# Altium PCB power.PcbDoc (part 2 of 2)
Units mm, origin at the board's own origin, x right, y up, seen from the top; angles counter-clockwise.
Board outline 100 x 100 mm, 2 copper layers (Top Layer, Bottom Layer); 57 components, 26 nets, 166 pads, 23 vias.
Unrouted connection lines stored in the file: 41.
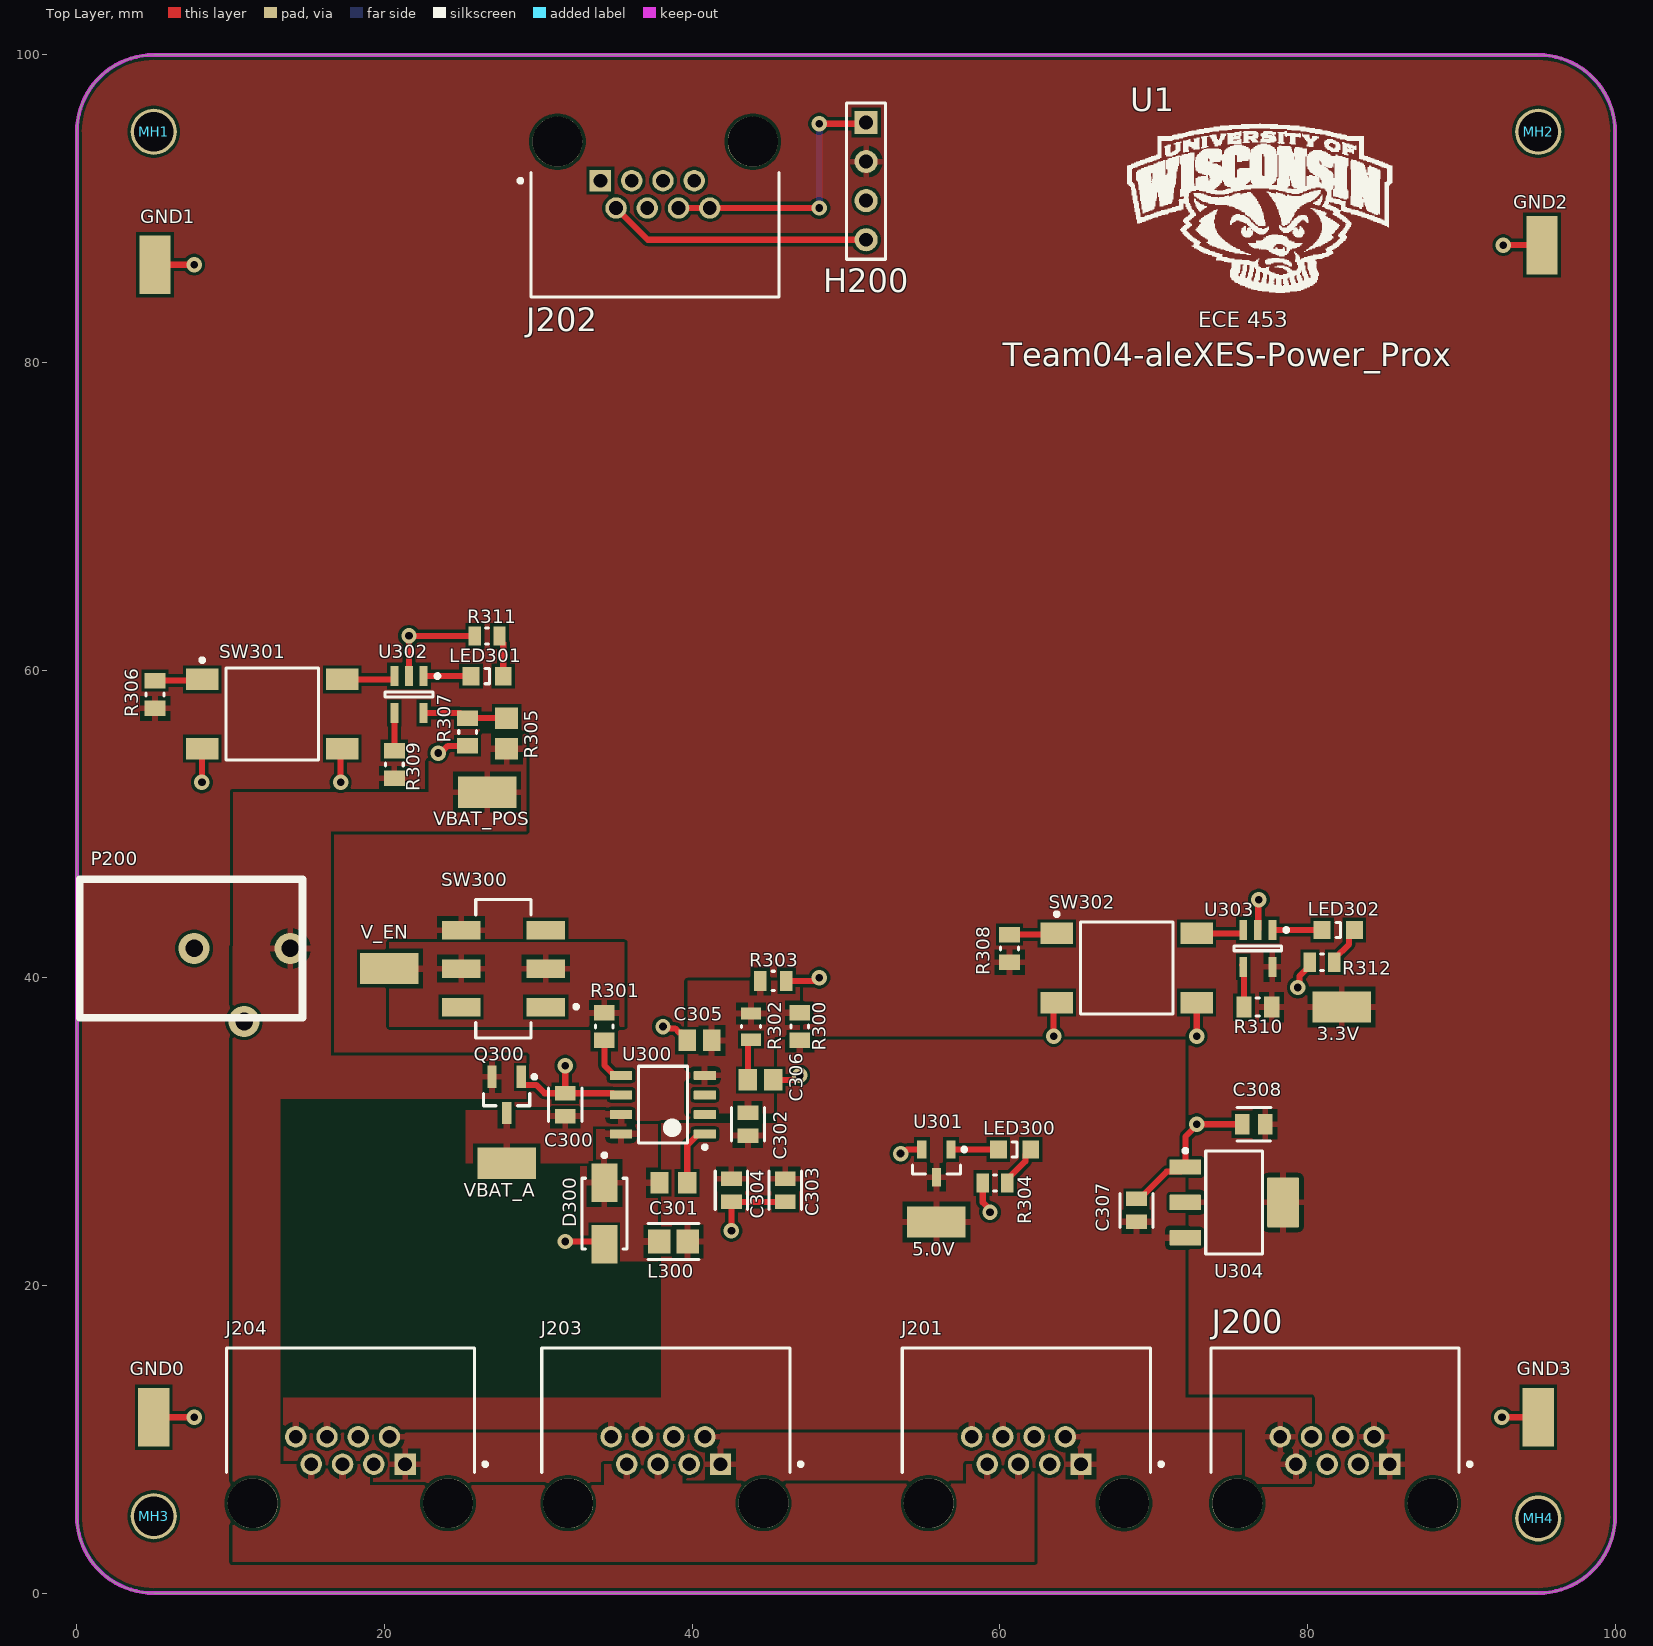
[diagram p0: Top Layer view]

## Part data (continued)
R303: library part CMP-2001-03875-2, "RES Thick Film, 3.24kΩ, 1%, 0.125W, 100ppm/°C, 0805", Case Code (Imperial)=0805, Case Code (Metric)=2012, Manufacturer=Vishay, Max Operating Temperature=155°C, Max Power Dissipation=125mW, Min Operating Temperature=-55°C, Package Height=0.45mm, Package Length=2mm, Package Quantity=10, Package Shape=Rectangular, Package Style=SMTMeter, Package Width=1.25mm, Rated Temperature=70°C, Resistance=3.24kR, Resistance Tolerance=1%, Resistor Type="Thick Film", Supplier Part Number=541-3.24KCCT-ND, Temperature Coefficient=100ppm/°C, Voltage Rating=150V, Case/Package=0805, Category="Chip SMD Resistors", ComponentLink1Description=https://datasheet.ciiva.com:443/pdfs/VipMasterIC/IC/VISH/VISH-S-A0007266705/VISH-S-A0007266705-1.pdf?src-supplier=IHS+Markit, ComponentLink1URL=https://datasheet.ciiva.com:443/pdfs/VipMasterIC/IC/VISH/VISH-S-A0007266705/VISH-S-A0007266705-1.pdf?src-supplier=IHS+Markit, ComponentLink2Description=https://datasheet.ciiva.com/16783/70201119-16783896.pdf?src-supplier=Allied+Electronics, ComponentLink2URL=https://datasheet.ciiva.com/16783/70201119-16783896.pdf?src-supplier=Allied+Electronics, ComponentLink3Description=https://datasheet.ciiva.com/7670/1697337-7670300.pdf?src-supplier=Element14, ComponentLink3URL=https://datasheet.ciiva.com/7670/1697337-7670300.pdf?src-supplier=Element14, ComponentLink4Description=https://datasheet.ciiva.com/7670/1533075-7670379.pdf?src-supplier=Element14, ComponentLink4URL=https://datasheet.ciiva.com/7670/1533075-7670379.pdf?src-supplier=Element14, ComponentLink5Description=https://datasheet.ciiva.com/2496/dcrcwe3-2496040.pdf?src-supplier=Digi-Key, ComponentLink5URL=https://datasheet.ciiva.com/2496/dcrcwe3-2496040.pdf?src-supplier=Digi-Key, ComponentLink6Description=https://datasheet.ciiva.com/2496/dcrcwe3-2496041.pdf?src-supplier=Digi-Key, ComponentLink6URL=https://datasheet.ciiva.com/2496/dcrcwe3-2496041.pdf?src-supplier=Digi-Key, ComponentLink7Description=https://datasheet.ciiva.com/2496/dcrcwe3-2496042.pdf?src-supplier=Digi-Key, ComponentLink7URL=https://datasheet.ciiva.com/2496/dcrcwe3-2496042.pdf?src-supplier=Digi-Key, ComponentLink8Description=https://datasheet.ciiva.com/9080/dcrcwe3-9080725.pdf?src-supplier=Avnet, ComponentLink8URL=https://datasheet.ciiva.com/9080/dcrcwe3-9080725.pdf?src-supplier=Avnet, Construction=Rectangular, Contact Plating=Tin, Depth=1.25mm, Features="Automotive AEC-Q200", Height=0.02inch, JESD-609 Code=e3, Lead Free="Lead Free", Length=2mm, Manufacturer Part Number=CRCW08053K24FKEA, Military Standard=Not, Mounting Technology="Surface Mount", Number of Pins=2, Number of Terminations=2, Packaging="Tape and Reel", Pins=2, Power=125mW, Power Rating=125mW, Pricing="1=0.1, 10=0.038, 50=0.0244, 100=0.0206, 500=0.01434, 1000=0.01248 (USD)", Radiation Hardening=No, Reach SVHC Compliant=Yes, Reference Standard=AEC-Q200, RoHS=Yes, RoHS Compliant=Yes, Series=CRCW, Size Code=0805, Stock=14960, Supplier=Digi-Key, Technology="THICK FILM", Terminal Finish=Nickel, Termination=Solder, Tolerance=1%, Voltage Rating (DC)=150V, Weight=0.000194oz, Width=1.25mm, Working Voltage=150V
R304 R311 R312: library part CMP-2000-06960-1, "Chip Resistor, 330 Ohm, +/- 1%, 125 mW, -55 to 155 degC, 0805 (2012 Metric), RoHS, Tape and Reel", Case Code (Imperial)=0805, Case Code (Metric)=2012, Manufacturer=Yageo, Manufacturer Part Number=CRCW0805330RFKEA, Max Operating Temperature=155°C, Max Power Dissipation=125mW, Min Operating Temperature=-55°C, Operating Temperature Range=-55Cto+155C, Package Description="2-Pin Surface Mounted Device, Body 2 x 1.25 mm", Package Quantity=5000, Power Rating=125mW(1/8W), Ratings=AEC-Q200, Resistance=330, Resistance Tolerance=1%, Resistor Type="Thick Film", Supplier Part Number=53K0164, Supplier Part Number 1=311-330CRCT-ND, Temperature Coefficient=100PPM/C, Voltage Rating=150V, Case Code - in=0805, Case Code - mm=2012, Case/Package=0805, Category="Chip SMD Resistors", ComponentLink1Description=https://datasheet.ciiva.com/2457/pyu-r-int-thick-7-2457015.pdf?src-supplier=Digi-Key, ComponentLink1URL=https://datasheet.ciiva.com/2457/pyu-r-int-thick-7-2457015.pdf?src-supplier=Digi-Key, ComponentLink2Description=https://datasheet.ciiva.com/2457/pyu-r-int-thick-7-2457016.pdf?src-supplier=Digi-Key, ComponentLink2URL=https://datasheet.ciiva.com/2457/pyu-r-int-thick-7-2457016.pdf?src-supplier=Digi-Key, ComponentLink3Description=https://datasheet.ciiva.com/2457/pyu-r-int-thick-7-2457014.pdf?src-supplier=Digi-Key, ComponentLink3URL=https://datasheet.ciiva.com/2457/pyu-r-int-thick-7-2457014.pdf?src-supplier=Digi-Key, ComponentLink4Description=https://datasheet.ciiva.com/12667/rc0805-12667925.pdf?src-supplier=Mouser, ComponentLink4URL=https://datasheet.ciiva.com/12667/rc0805-12667925.pdf?src-supplier=Mouser, ComponentLink5Description=https://datasheet.ciiva.com/7941/444164-7941768.pdf?src-supplier=Element14, ComponentLink5URL=https://datasheet.ciiva.com/7941/444164-7941768.pdf?src-supplier=Element14, ComponentLink6Description=https://datasheet.ciiva.com/7941/444164-7941769.pdf?src-supplier=Element14, ComponentLink6URL=https://datasheet.ciiva.com/7941/444164-7941769.pdf?src-supplier=Element14, ComponentLink7Description=https://datasheet.ciiva.com/16740/rc0805-16740975.pdf?src-supplier=Future+Electronics, ComponentLink7URL=https://datasheet.ciiva.com/16740/rc0805-16740975.pdf?src-supplier=Future+Electronics, ComponentLink8Description=https://datasheet.ciiva.com/8944/dcrcwe3-8944773.pdf?src-supplier=Avnet, ComponentLink8URL=https://datasheet.ciiva.com/8944/dcrcwe3-8944773.pdf?src-supplier=Avnet, ComponentLink9Description=https://datasheet.ciiva.com/8944/dcrcwe3-8944776.pdf?src-supplier=Avnet, ComponentLink9URL=https://datasheet.ciiva.com/8944/dcrcwe3-8944776.pdf?src-supplier=Avnet, ComponentLink10Description=https://datasheet.ciiva.com/7777/1697337-7777390.pdf?src-supplier=Element14, ComponentLink10URL=https://datasheet.ciiva.com/7777/1697337-7777390.pdf?src-supplier=Element14, ComponentLink11Description=https://datasheet.ciiva.com/16769/70201119-16769852.pdf?src-supplier=Allied+Electronics, ComponentLink11URL=https://datasheet.ciiva.com/16769/70201119-16769852.pdf?src-supplier=Allied+Electronics, Construction=Rectangular, Contact Plating=Tin, Datasheet URL=http://www.yageo.com/documents/recent/PYu-RC_Group_51_RoHS_L_7.pdf, Datasheet Version="Rev. 7, 05/2017", Depth=1.25mm, Features="Moisture Resistant", Height=0.024inch, Lead Free="Lead Free", Length=0.079inch, Manufacturer 1=Yageo, Manufacturer Part Number 1=RC0805FR-07330RL, Manufacturer URL=http://www.yageo.com/, Military Standard=Not, Mounting Technology=SurfaceMount, Number of Terminations=2, Package Reference=0805, Packaging=Reel, Pricing="1=0.02, 25=0.02, 50=0.02, 100=0.02 (USD)", Pricing 1="1=0.10000, 10=0.03700, 100=0.01510, 1000=0.00680, 2500=0.00590 (USD)", Product=ThickFilmResistorsGeneralPurpose, Reach SVHC Compliant=Unknown, RoHS=Yes, RoHS Compliant=Yes, Series=RC, Size Code=0805, Stock=218356, Stock 1=1297787, Supplier=Newark, Supplier 1=Digi-Key, Termination=SMD/SMT, Termination Style=SMD/SMT, Tolerance=1%, Voltage Rating (DC)=150V, Weight=0.000194oz, Width=0.049inch
R305: library part RES_0805_K_030.00, "Res Thick Film 0805 30K Ohm 1% 0.125W(1/8W) ±100ppm/°C Pad SMD Automotive T/R", Case Code (Imperial)=0805, Case Code (Metric)=2012, Manufacturer 1=Panasonic, Manufacturer Part Number 1=ERJ-6ENF3002V, Max Operating Temperature=155°C, Max Power Dissipation=125mW, Min Operating Temperature=-55°C, Package Quantity=1, Resistance Tolerance=1%, Resistor Type="Thick Film", Supplier Part Number 1=P30.0KCCT-ND, Temperature Coefficient=100ppm/°C, Voltage Rating=150V, Case/Package=0805, Category="Chip SMD Resistors", ComponentLink1Description=https://datasheet.ciiva.com/11821/0900766b80f80784-11821600.pdf?src-supplier=RSComponents, ComponentLink1URL=https://datasheet.ciiva.com/11821/0900766b80f80784-11821600.pdf?src-supplier=RSComponents, ComponentLink2Description=https://datasheet.ciiva.com/9117/aoa0000ce2-9117485.pdf?src-supplier=Avnet, ComponentLink2URL=https://datasheet.ciiva.com/9117/aoa0000ce2-9117485.pdf?src-supplier=Avnet, ComponentLink3Description=https://datasheet.ciiva.com/24124/aoa0000ce2-24124393.pdf?src-supplier=Mouser, ComponentLink3URL=https://datasheet.ciiva.com/24124/aoa0000ce2-24124393.pdf?src-supplier=Mouser, ComponentLink4Description=https://datasheet.ciiva.com/30169/aoa0000ce2-30169447.pdf?src-supplier=Onlinecomponents.com, ComponentLink4URL=https://datasheet.ciiva.com/30169/aoa0000ce2-30169447.pdf?src-supplier=Onlinecomponents.com, ComponentLink5Description=https://datasheet.ciiva.com/17210/aoa0000ce2-17210478.pdf?src-supplier=Avnet+Europe, ComponentLink5URL=https://datasheet.ciiva.com/17210/aoa0000ce2-17210478.pdf?src-supplier=Avnet+Europe, ComponentLink6Description=https://datasheet.ciiva.com/22673/1678782-22673293.pdf?src-supplier=Element14, ComponentLink6URL=https://datasheet.ciiva.com/22673/1678782-22673293.pdf?src-supplier=Element14, ComponentLink7Description=https://datasheet.ciiva.com/28565/1694929-28565193.pdf?src-supplier=Element14, ComponentLink7URL=https://datasheet.ciiva.com/28565/1694929-28565193.pdf?src-supplier=Element14, ComponentLink8Description=https://datasheet.ciiva.com/46441/1678782-46441405.pdf?src-supplier=Element14, ComponentLink8URL=https://datasheet.ciiva.com/46441/1678782-46441405.pdf?src-supplier=Element14, ComponentLink9Description=https://datasheet.ciiva.com/46441/1678782-46441406.pdf?src-supplier=Element14, ComponentLink9URL=https://datasheet.ciiva.com/46441/1678782-46441406.pdf?src-supplier=Element14, ComponentLink10Description=https://datasheet.ciiva.com/16512/aoa0000ce2-16512236.pdf?src-supplier=Avnet+Asia, ComponentLink10URL=https://datasheet.ciiva.com/16512/aoa0000ce2-16512236.pdf?src-supplier=Avnet+Asia, ComponentLink11Description=https://datasheet.ciiva.com/7711/1678782-7711062.pdf?src-supplier=Element14, ComponentLink11URL=https://datasheet.ciiva.com/7711/1678782-7711062.pdf?src-supplier=Element14, Construction=Rectangular, Contact Plating=Tin, Depth=1.25mm, Features="Automotive AEC-Q200", Height=0.6mm, Lead Free="Lead Free", Length=2mm, Military Standard=Not, Mount="Surface Mount", Number of Terminations=2, Packaging="Tape and Reel", Power Rating=125mW, Pricing 1="1=0.10000, 10=0.07500, 100=0.02880, 1000=0.01265, 2500=0.01092 (USD)", Radiation Hardening=No, REACH SVHC=Unknown, Resistance=30K, RoHS=Yes, RoHS Compliant=Yes, Series=ERJ, Stock 1=296893, Supplier 1=Digi-Key, Technology="THICK FILM", Termination=SMD/SMT, Tolerance=1%, Voltage Rating (DC)=150V, Weight=0.000194oz, Width=0.049inch
SW300: "C & K COMPONENTS - JS202011SCQN - SWITCH, DPDT, 0.6A, 6VDC, SMD", Actuator Color=Black, Contact Current Rating=300mA, Contact Resistance=70mR, Flammability Rating="UL94 V-2", Manufacturer 1="ITT C&K", Max Operating Temperature=85°C, Max Voltage Rating (DC)=6V, Min Operating Temperature=-20°C, Package Quantity=1, Supplier Part Number 1=401-2002-1-ND, Actuator Length=2mm, Actuator Material=Nylon,Polyamide,PA46, Actuator Type=Standard, Category="Slide Switches", ComponentLink1Description=https://datasheet.ciiva.com/2889/js-29aug13-2889127.pdf?src-supplier=Digi-Key, ComponentLink1URL=https://datasheet.ciiva.com/2889/js-29aug13-2889127.pdf?src-supplier=Digi-Key, ComponentLink2Description=https://datasheet.ciiva.com/23829/1707718-23829488.pdf?src-supplier=Newark, ComponentLink2URL=https://datasheet.ciiva.com/23829/1707718-23829488.pdf?src-supplier=Newark, ComponentLink3Description=https://datasheet.ciiva.com/8625/js-9dec14-8625470.pdf?src-supplier=Avnet, ComponentLink3URL=https://datasheet.ciiva.com/8625/js-9dec14-8625470.pdf?src-supplier=Avnet, ComponentLink4Description=https://datasheet.ciiva.com/2889/js-15sept15-2889128.pdf?src-supplier=Digi-Key, ComponentLink4URL=https://datasheet.ciiva.com/2889/js-15sept15-2889128.pdf?src-supplier=Digi-Key, ComponentLink5Description=https://datasheet.ciiva.com/2889/js-15sept15-2889129.pdf?src-supplier=Digi-Key, ComponentLink5URL=https://datasheet.ciiva.com/2889/js-15sept15-2889129.pdf?src-supplier=Digi-Key, ComponentLink6Description=https://datasheet.ciiva.com/22630/1707718-22630697.pdf?src-supplier=Element14, ComponentLink6URL=https://datasheet.ciiva.com/22630/1707718-22630697.pdf?src-supplier=Element14, Contact Material="Copper Alloy", Contact Plating=Silver, Current Rating=300mA, Depth=7.5mm, Electrical Life=5000Cycles, Housing Material=Nylon, Lead Free="Lead Free", Length=9mm, Manufacturer Part Number 1=JS202011SCQN, Max Current Rating=300mA, Mount="Surface Mount", Orientation=Vertical, Packaging="Tape and Reel", Pricing 1="1=0.55000, 10=0.53000, 25=0.51040, 100=0.44180, 250=0.40252, 500=0.37306 (USD)", Radiation Hardening=No, REACH SVHC="No SVHC", RoHS=Yes, Series=JS, Stock 1=21096, Supplier 1=Digi-Key, Switch Function=On-On, Switch Travel=2mm, Termination="Gull Wing", Throw Configuration=DPDT, Voltage Rating (DC)=6V
SW301 SW302: library part CMP-2000-05602-2, "Swicth, SPST, 24 V, -35 to 85 degC, 4-Pin SMD, RoHS, Tape and Reel", Case/Package=SMD/SMT, Color=Black, Contact Current Rating=50mA, Contact Resistance=100mOhm, Insulation Resistance=100MR, Manufacturer="TE Connectivity", Max Operating Temperature=85degC, Max Voltage Rating (DC)=12V, Min Operating Temperature=-35degC, Operating Force=1.57N, Package Description="4-Pin Surface Mount Device, Body 6 x 6 mm, Pitch 4.5 mm", Package Quantity=750, Supplier Part Number=27AC5877, Supplier Part Number 1=450-1129-ND, Voltage Rating=24V, Actuator Length=0.055inch, Actuator Material=Polyamide, Actuator Type=Standard, Case\/Package=SMD/SMT, Category="Pushbutton Switches", Contact Material=CopperAlloy, Contact Plating=Silver, Current Rating=50mA, Datasheet URL=http://www.te.com/commerce/DocumentDelivery/DDEController?Action=showdoc&DocId=Customer+Drawing%7F2-1437565-7%7FV%7Fpdf%7FEnglish%7FENG_CD_2-1437565-7_V.pdf%7F4-1437565-2, Datasheet Version="Rev. V, 02/2015", Depth=10mm, Electrical Life=100000Cycles, ELV=Compliant, Illumination Type=Illuminated, Lead Free="Lead Free", Length=6mm, Manufacturer 1="TE Connectivity", Manufacturer Part Number=FSM4JSMA, Manufacturer Part Number 1=FSM4JSMA, Manufacturer URL=http://www.te.com/, Max Current Rating=50mA, Mechanical Life=100000Cycles, Mount=SurfaceMount, Mounting Technology=SurfaceMount, Orientation=Straight, Package Reference=FSM4JSMA, Packaging=LoosePiece, Pricing="1=0.292, 10=0.274, 25=0.255, 100=0.232, 500=0.2, 1000=0.166 (USD)", Pricing 1="1=0.27000, 10=0.26300, 25=0.24960, 100=0.22600, 250=0.20604, 750=0.19152, 1500=0.16339, 3000=0.15885, 5250=0.14977 (USD)", Radiation Hardening=No, REACH SVHC=Unknown, Reach SVHC Compliant=Unknown, RoHS=Yes, RoHS Compliant=Yes, RoHSCompliant=true, Series=FSMJSMA, Stock=46743, Stock 1=65608, Supplier=Newark, Supplier 1=Digi-Key, Switch Function=Off-Mom, Switch Travel=0.25mm, Termination=GullWing, Throw Configuration=SPST, Voltage Rating (DC)=24V, Width=6mm
U1: "Bucky Badger Image", Manufacturer Part Number="UW Bucky"
U300: library part CMP-0323-00191-3, "Buck Step Down Regulator with 5.5 to 36 V Input and 1.23 to 31 V Output, -40 to 125 degC, 8-Pin SOIC (D), Green (RoHS & no Sb/Br)", Case/Package=SOP, Frequency=600kHz, Manufacturer="Texas Instruments", Max Operating Temperature=125°C, Max Output current=1.8A, Max Supply Voltage=36V, Min Input Voltage=5.5V, Min Operating Temperature=-40°C, Package Body Material=Plastic, Package Equivalence Code=SOP8,.25, Package Shape=Rectangular, Package Style="SMALL OUTLINEMeter", Peak Reflow Temperature (Cel)=260°C, Rating=Catalog, Supplier Part Number=296-20787-5-ND, Switch Current Limit(Typ)(A)=1.2, Temperature Grade=AUTOMOTIVE, Category="Voltage Regulators - Switching", Channels=1, Code_JEDEC=MS-012AA, ComponentLink1Description=Datasheet, ComponentLink1URL=http://www.ti.com/general/docs/lit/getliterature.tsp?genericPartNumber=TPS5410&fileType=pdf, ComponentLink2Description="Package Specification", ComponentLink2URL=http://www.ti.com/litv/pdf/msoi002j, ComponentLink3Description="URL Link1", ComponentLink3URL="Samples URL:http://www.ti.com/product/tps5410#samples", ComponentLink4Description=https://www.ti.com:443/lit/ds/symlink/tps5410.pdf?src-supplier=IHS+Markit, ComponentLink4URL=https://www.ti.com:443/lit/ds/symlink/tps5410.pdf?src-supplier=IHS+Markit, ComponentLink5Description=https://datasheet.ciiva.com/15113/getdatasheetpartid-224296-15113874.pdf?src-supplier=Verical, ComponentLink5URL=https://datasheet.ciiva.com/15113/getdatasheetpartid-224296-15113874.pdf?src-supplier=Verical, ComponentLink6Description=https://datasheet.ciiva.com/2026/tps5410-2026736.pdf?src-supplier=Digi-Key, ComponentLink6URL=https://datasheet.ciiva.com/2026/tps5410-2026736.pdf?src-supplier=Digi-Key, ComponentLink7Description=https://datasheet.ciiva.com/27056/2003563-27056017.pdf?src-supplier=Jameco, ComponentLink7URL=https://datasheet.ciiva.com/27056/2003563-27056017.pdf?src-supplier=Jameco, ComponentLink8Description=https://datasheet.ciiva.com/7993/1851017-7993797.pdf?src-supplier=Element14, ComponentLink8URL=https://datasheet.ciiva.com/7993/1851017-7993797.pdf?src-supplier=Element14, Control Mode=VOLTAGE-MODE, Control Technique="PULSE WIDTH MODULATION", DatasheetVersion=SLVS675A, Duty Cycle(Max)(%)=87.5, Eco-Plan="Green (RoHS & no Sb/Br)", Height - Seated (Max)=1.75mm, Iout(Max)(A)=1, Iq(Typ)(mA)=3, JESD-30 Code=R-PDSO-G8, JESD-609 Code=e4, Length=4.9mm, Manufacturer Part Number=TPS5410D, Moisture Sensitivity Level=2, Mounting Technology="Surface Mount", PackageDescription="8-Pin Plastic Small Outline Integrated Circuit, 4.9 x 3.9 mm, Pitch 1.27 mm Pitch", PackageReference=D0008A, PackageVersion="revM, Jun-2011", PartNumber=TPS5410D, Pins=8, Pricing="1=3.42, 10=3.072, 25=2.9044, 100=2.517, 250=2.38796, 500=2.1427, 1000=1.80709, 2500=1.71674, 5000=1.6522 (USD)", Qualification Status="Not Qualified", Reach SVHC Compliant=Yes, Regulated Outputs(#)=1, RoHS=Yes, RoHS Compliant=Yes, Stock=6339, SubFamily="Step-Down Regulator", Supplier=Digi-Key, Surface Mount=Yes, Switcher Configuration=BUCK, Terminal Finish=Nickel, Terminal Form="Gull Wing", Terminal Pitch=1.27mm, Terminal Position=DUAL, Throw Configuration="SWITCHING REGULATOR", Topology=Buck, Vin(Max)(V)=36, Vin(Min)(V)=5.5, Vout(Max)(V)=31, Vout(Min)(V)=1.23, Width=3.9mm
U301: library part CMP-0130-00073-1, "1.75Î¼A Micropower Voltage Detector, Push-Pull Output, 4.63V, 3-Pin SOT-23, Extended Temperature, Tape and Reel", Case/Package=TSSOP, Manufacturer=Microchip, Max Operating Temperature=125°C, Max Supply Voltage=5.5V, Min Operating Temperature=-40°C, Min Supply Voltage=1V, Package Body Material=Plastic, Package Equivalence Code=TO-236, Package Shape=Rectangular, Package Style="SMALL OUTLINE, THIN PROFILE, SHRINK PITCHMeter", Peak Reflow Temperature (Cel)=260°C, Power Supplies=1/5.5V, Supplier Part Number=MCP112T-475E/TTCT-ND, Supply Current-Max (Isup)=1.75uA, Temperature Grade=AUTOMOTIVE, Threshold Voltage-Nom=4.63V, Time @ Peak Reflow Temperature-Max (s)=40s, Adjustable Threshold=No, Category="Voltage Supervisors", Channels=1, Code_IPC=SOT23-3, ComponentLink1Description=https://datasheet.ciiva.com:443/pdfs/VipMasterIC/IC/MCHP/MCHP-S-A0002312823/MCHP-S-A0002312823-1.pdf?src-supplier=IHS+Markit, ComponentLink1URL=https://datasheet.ciiva.com:443/pdfs/VipMasterIC/IC/MCHP/MCHP-S-A0002312823/MCHP-S-A0002312823-1.pdf?src-supplier=IHS+Markit, ComponentLink2Description=https://datasheet.ciiva.com/1974/21889d-1974510.pdf?src-supplier=Digi-Key, ComponentLink2URL=https://datasheet.ciiva.com/1974/21889d-1974510.pdf?src-supplier=Digi-Key, ComponentLink3Description=https://datasheet.ciiva.com/1974/21889d-1974511.pdf?src-supplier=Digi-Key, ComponentLink3URL=https://datasheet.ciiva.com/1974/21889d-1974511.pdf?src-supplier=Digi-Key, ComponentLink4Description=https://datasheet.ciiva.com/1974/21889d-1974512.pdf?src-supplier=Digi-Key, ComponentLink4URL=https://datasheet.ciiva.com/1974/21889d-1974512.pdf?src-supplier=Digi-Key, ComponentLink5Description=https://datasheet.ciiva.com/9215/21889d-9215465.pdf?src-supplier=Avnet, ComponentLink5URL=https://datasheet.ciiva.com/9215/21889d-9215465.pdf?src-supplier=Avnet, ComponentLink6Description=https://datasheet.ciiva.com/1170/21889d-1170331.pdf?src-supplier=Element14, ComponentLink6URL=https://datasheet.ciiva.com/1170/21889d-1170331.pdf?src-supplier=Element14, DatasheetVersion="revD, Jun-2005", Height - Seated (Max)=1.12mm, JESD-30 Code=R-PDSO-G3, JESD-609 Code=e3, Length=2.92mm, Manufacturer Part Number=MCP112T-475E/TT, Moisture Sensitivity Level=1, Number of Channels=1, PackageDescription="3-Lead Plastic Small Outline Transistor (TT) [SOT-23]", PackageReference=SOT-23-TT3, PackageVersion="revBB, Aug-2009", Pins=3, Pricing="1=0.6, 25=0.5, 100=0.46 (USD)", Qualification Status="Not Qualified", Reach SVHC Compliant=Yes, RoHS=Yes, RoHS Compliant=Yes, Stock=2856, Supplier=Digi-Key, Surface Mount=Yes, Terminal Finish=Tin, Terminal Form="Gull Wing", Terminal Pitch=0.96mm, Terminal Position=DUAL, Throw Configuration="POWER SUPPLY SUPPORT CIRCUIT", Width=1.3mm
U302 U303: library part CMP-0138-00207-1, "Voltage Supervisor, 5-Pin SOT-23, Extended Temperature, Tape and Reel", Case/Package=SOT-23, Manufacturer=Microchip, Max Operating Temperature=125°C, Max Output current=10mA, Max Power Dissipation=240mW, Max Reset Threshold Voltage=2.944V, Max Supply Current=10uA, Max Supply Voltage=5.5V, Min Operating Temperature=-40°C, Min Reset Threshold Voltage=2.857V, Min Supply Voltage=1V, Number of Voltages Monitored=1, Package Quantity=3000, Quiescent Current=1uA, Supplier Part Number=34M7402, Threshold Voltage=2.9V, Category="Voltage Supervisors", Code_IPC=SOT23-5, ComponentLink1Description=https://datasheet.ciiva.com/1969/21985d-1969832.pdf?src-supplier=Digi-Key, ComponentLink1URL=https://datasheet.ciiva.com/1969/21985d-1969832.pdf?src-supplier=Digi-Key, ComponentLink2Description=https://datasheet.ciiva.com/1969/21985d-1969833.pdf?src-supplier=Digi-Key, ComponentLink2URL=https://datasheet.ciiva.com/1969/21985d-1969833.pdf?src-supplier=Digi-Key, ComponentLink3Description=https://datasheet.ciiva.com/14562/70045388-14562791.pdf?src-supplier=Allied+Electronics, ComponentLink3URL=https://datasheet.ciiva.com/14562/70045388-14562791.pdf?src-supplier=Allied+Electronics, ComponentLink4Description=https://datasheet.ciiva.com/8140/21985c-8140440.pdf?src-supplier=Avnet, ComponentLink4URL=https://datasheet.ciiva.com/8140/21985c-8140440.pdf?src-supplier=Avnet, DatasheetVersion="revB, Oct-2007", Height=1.3mm, Lead Free="Lead Free", Length=3.1mm, Manufacturer Part Number=MCP1316T-29LE/OT, Mounting Technology="Surface Mount", Number of Elements=1, Operating Supply Current=10uA, Output=TOTEM-POLE, Overvoltage Threshold=2.944V, PackageDescription="5-Lead Plastic Small Outline Transistor (OT) [SOT-23]", PackageReference=SOT-23-OT5, PackageVersion="revBB, Aug-2009", Packaging="Tape and Reel", Pins=5, Power Dissipation=240mW, Pricing="1=0.877, 10=0.805, 25=0.732 (USD)", Radiation Hardening=No, Reach SVHC Compliant=No, Reset="Active Low", Reset Timeout=140ms, RoHS=Yes, RoHS Compliant=Yes, Stock=8598, Supplier=Newark, Supply Current=10uA, Termination=SMD/SMT, Type="Simple Reset/Power-On Reset", Undervoltage Threshold=2.857V, Watchdog Timer=Yes, Width=1.8mm
U304: library part CMP-0395-00499-2, "Single Output LDO, 1 A, Fixed 3.3 V Output, 2 to 5.5 V Input, 4-pin SOT-223 (DCY), -40 to 125 degC, Green (RoHS & no Sb/Br)", Case/Package=SOT-223, Dropout Voltage=455mV, Manufacturer="Texas Instruments", Manufacturer Part Number=TLV1117-33CDCYR, Max Input Voltage=5.5V, Max Operating Temperature=125°C, Max Output current=1A, Max Output Voltage=3.3V, Max Power Dissipation=1.59W, Max Supply Voltage=15V, Min Current Limit=1.1A, Min Input Voltage=2V, Min Operating Temperature=-40°C, Output Voltage Accuracy=1.5%, Package Quantity=250, Power Supply Rejection Ratio (PSRR)=75dB, Quiescent Current=50uA, Supplier Part Number=29AH1523, Supplier Part Number 1=296-35976-1-ND, Accuracy=2%, Accuracy(%)=2, Category="Voltage Regulators - Linear", Code_JEDEC=TO-261, ComponentLink1Description="Manufacturer URL", ComponentLink1URL=http://www.ti.com/, ComponentLink2Description=Datasheet, ComponentLink2URL=http://www.ti.com/general/docs/lit/getliterature.tsp?genericPartNumber=TLV1117LV33&fileType=pdf, ComponentLink3Description="Package Specification", ComponentLink3URL=http://www.ti.com/litv/pdf/mpds094a, ComponentLink4Description=http://www.ti.com/general/docs/lit/getliterature.tsp?genericPartNumber=TLV1117LV&&fileType=pdf&src-supplier=Farnell, ComponentLink4URL=http://www.ti.com/general/docs/lit/getliterature.tsp?genericPartNumber=TLV1117LV&&fileType=pdf&src-supplier=Farnell, ComponentLink5Description=http://www.farnell.com/datasheets/1950591.pdf?src-supplier=Element14, ComponentLink5URL=http://www.farnell.com/datasheets/1950591.pdf?src-supplier=Element14, ComponentLink6Description=http://www.ti.com/lit/ds/symlink/tlv1117lv.pdf?src-supplier=Digi-Key, ComponentLink6URL=http://www.ti.com/lit/ds/symlink/tlv1117lv.pdf?src-supplier=Digi-Key, ComponentLink7Description=http://www.ti.com/general/docs/suppproductinfo.tsp?distId=10&amp;gotoUrl=http%3A%2F%2Fwww.ti.com%2Flit%2Fgpn%2Ftlv1117lv&src-supplier=Digi-Key, ComponentLink7URL=http://www.ti.com/general/docs/suppproductinfo.tsp?distId=10&amp;gotoUrl=http%3A%2F%2Fwww.ti.com%2Flit%2Fgpn%2Ftlv1117lv&src-supplier=Digi-Key, ComponentLink8Description=http://www.ti.com/lit/gpn/tlv1117lv?src-supplier=Mouser, ComponentLink8URL=http://www.ti.com/lit/gpn/tlv1117lv?src-supplier=Mouser, ComponentLink9Description=http://www.ti.com/general/docs/lit/getliterature.tsp?genericPartNumber=TLV1117LV&&fileType=pdf&src-supplier=Avnet, ComponentLink9URL=http://www.ti.com/general/docs/lit/getliterature.tsp?genericPartNumber=TLV1117LV&&fileType=pdf&src-supplier=Avnet, ComponentLink10Description=http://components.arrow.com/part/dataview/51117919S8954709N7713?src-supplier=Arrow+Electronics, ComponentLink10URL=http://components.arrow.com/part/dataview/51117919S8954709N7713?src-supplier=Arrow+Electronics, ComponentLink11Description=http://www.ti.com/general/docs/lit/getliterature.tsp?genericPartNumber=TLV1117-33&amp;&amp;fileType=pdf&src-supplier=Newark, ComponentLink11URL=http://www.ti.com/general/docs/lit/getliterature.tsp?genericPartNumber=TLV1117-33&amp;&amp;fileType=pdf&src-supplier=Newark, ComponentLink12Description=http://www.ti.com/general/docs/suppproductinfo.tsp?distId=10&amp;gotoUrl=http%3A%2F%2Fwww.ti.com%2Flit%2Fgpn%2Ftlv1117&src-supplier=Digi-Key, ComponentLink12URL=http://www.ti.com/general/docs/suppproductinfo.tsp?distId=10&amp;gotoUrl=http%3A%2F%2Fwww.ti.com%2Flit%2Fgpn%2Ftlv1117&src-supplier=Digi-Key, Contact Plating=Tin, DatasheetVersion=SBVS160A, Eco-Plan="Green (RoHS & no Sb/Br)", Fixed Output Options(V)=3.3, Iout(Max)(A)=1, Iq(Typ)(mA)=0.05, Lead Free="Lead Free", Manufacturer 1="Texas Instruments", Manufacturer Part Number 1=TLV1117LV33DCYT, Min Output Voltage=3.3V, Mounting Technology="Surface Mount", Nominal Output Voltage=3.3V, Number of Outputs=1, Number of Pins=4, Number of Regulators=1, Output Configuration=Positive, Output Current=1A, Output Type=Fixed, Output Voltage=3.3V, PackageDescription="4-Pin Plastic Small Outline, Body 3.5 x 6.5 mm, Pitch 2.3 mm", PackageReference=DCY0004A, PackageVersion=4202506/B, Packaging="Tape and Reel", PartNumber=TLV1117LV33DCYT, Pins=3, Polarity=Positive, Power Dissipation=1.59W, Pricing="1=0.965, 10=0.923, 25=0.877, 50=0.839, 100=0.803, 250=0.777, 500=0.759, 1000=0.746 (USD)", Pricing 1="1=1.15000, 10=1.02600, 25=0.97360, 100=0.79970 (USD)", Radiation Hardening=No, Reach SVHC Compliant=Yes, RoHS=Yes, RoHS Compliant=Yes, Series=-, Stock 1=1411, SubFamily="Single Channel LDO", Supplier=Newark, Supplier 1=Digi-Key, Vdo(Typ)(mV)=1200, Vin(Max)(V)=5.5, Vin(Min)(V)=2, Vout Adj(Max)(V)=3.3, Vout Adj(Min)(V)=3.3

## Via types
v1: diameter 1, hole 0.5, Top Layer to Bottom Layer, 23 vias

## Nets (pads, with @x,y where several pads share a name; then routed paths per layer and width w, separated by ;. In a path a pad name is that pad's centre, name@x,y a point inside that pad or via, vN(x,y) a via of type N, cw(c..) or ccw(c..) an arc to the next point about the centre after c; other vN are vias at no path point)
3.3V: 3.3V.1 C308.1 H200.2 J200.1 J200.2 J201.1 J201.2 J203.1 J203.2 J204.1 J204.2 R306.2 R308.2 R309.1 R310.1 SW300.6 U303.5 U304.2 U304.4
3V3_MR_n: SW302.2 U303.3 | length 3.3
  Top Layer w0.4: SW302.2 75.766,42.89 75.853,42.977 U303.3@75.853,43.158
3V3_PB_RST: R308.1 SW302.1 | length 3.1
  Top Layer w0.4: R308.1 63.62,42.81 SW302.1
3V3_PG_R: LED302.1 R312.2 | length 2.6
  Top Layer w0.4: R312.2 81.75,41.235 82.7,42.185 82.7,42.76 LED302.1
3V3_PWR_GOOD: LED302.2 U303.1 | length 3.2
  Top Layer w0.4: U303.1 LED302.2
3V3_WDI: R310.2 U303.4 | length 2.8
  Top Layer w0.4: U303.4@75.764,40.851 75.87,40.745 R310.2
5.0V: 5.0V.1 C302.1 C303.1 C304.1 C307.1 J200.7 J200.8 J201.6 J201.8 J203.6 J203.8 J204.6 J204.8 L300.2 R300.1 U301.3 U304.3
5V_PG_R: LED300.1 R304.2 | length 2.8
  Top Layer w0.4: R304.2 60.49,26.895 61.66,28.065 61.66,28.495 LED300.1@61.996,28.832
5V_PWR_GOOD: LED300.2 U301.1 | length 2.9
  Top Layer w0.4: U301.1 59.56,28.84 59.627,28.773 LED300.2@59.627,28.743
EN: H200.4 J202.2 | length 17.1
  Top Layer w0.4: J202.2 37.112,87.983 51.264,87.983 H200.4@51.293,88.013
ENA: R301.2 U300.5 | length 3
  Top Layer w0.4: R301.2 34.29,34.315 34.95,33.655 U300.5
GND: C300.2 C303.2 C304.2 C305.1 C306.1 C307.2 C308.2 D300.2 GND0.1 GND1.1 GND2.1 GND3.1 H200.3 J200.4 J200.5 J201.3 J201.4 J202.3 J202.4 J203.3 J203.4 J204.3 J204.4 P200.2 P200.3 Q300.1 R303.1 R304.1 R307.1 R311.1 R312.1 SW301.3 SW301.4 SW302.3 SW302.4 U300.6 U301.2 U302.2 U303.2 U304.1 | length 68.6
  Top Layer w0.4: GND0.1 v1(7.62,11.43) ; GND1.1 v1(7.62,86.36) ; v1(8.128,52.705) 8.128,54.878 SW301.3 ; v1(17.145,52.705) 17.145,54.795 SW301.4 ; U302.2 v1(21.59,62.23) R311.1 ; v1(23.495,54.61) 23.655,54.61 24.125,55.08 R307.1 ; Q300.1 28.89,33.135 28.99,33.035 29.865,33.035 30.4,32.5 C300.2 ; v1(31.75,22.86) 34.1,22.86 D300.2 ; v1(31.75,34.29) C300.2 ; U300.6@35.327,32.373 34.962,32.373 34.835,32.5 C300.2 ; v1(38.1,36.83) 38.215,36.715 38.89,36.715 39.175,36.43 39.3,36.43 39.675,36.055 C305.1 ; v1(42.55,23.558) C304.2 C303.2 ; C306.1 46.533,33.36 46.828,33.655 v1(46.99,33.655) ; R303.1 47.893,39.8 48.098,40.005 v1(48.26,40.005) ; v1(53.547,28.575) 53.709,28.575 53.974,28.84 U301.2 ; R304.1 58.89,25.401 59.364,24.927 v1(59.364,24.765) ; v1(63.5,36.195) 63.5,38.19 SW302.3 ; C307.2 69.085,25.63 70.855,27.4 71.76,27.4 U304.1 72.06,29.664 72.8,30.404 v1(72.8,30.48) C308.2 ; v1(72.8,36.195) SW302.4 ; U303.2 76.803,43.142 76.803,45.053 v1(76.835,45.085) ; v1(79.375,39.37) 79.49,39.485 79.49,40.124 80.15,40.785 R312.1 ; v1(92.641,11.43) GND3.1 ; v1(92.732,87.63) GND2.1
NetC301_1: C301.1 U300.1 | length 3.9
  Top Layer w0.4: C301.1 39.675,29.12 40.4,29.845 U300.1
NetC306_2: C306.2 R302.1 | length 2.7
  Top Layer w0.4: C306.2 43.625,35.779 R302.1
OUT: H200.1 J202.6 J202.8 | length 17.7
  Top Layer w0.4: J202.6 J202.8 v1(48.26,90.043) ; v1(48.26,95.524) 51.229,95.524 H200.1
  Bottom Layer w0.4: v1(48.26,90.043) v1(48.26,95.524)
V_EN: R301.1 SW300.2 SW300.5 V_EN.1
V_PH/BOOT: C301.2 D300.1 L300.1 U300.8
V_SENSE: C302.2 C305.2 R300.2 R302.2 R303.2 U300.4
VBAT_A: C300.1 Q300.3 U300.7 VBAT_A.1
VBAT_POS: J201.5 J201.7 J203.5 J203.7 J204.5 J204.7 P200.1 Q300.2 R305.2 VBAT_POS.1
VBAT_POS_DROP: R305.1 R307.2 U302.5 | length 5.5
  Top Layer w0.4: U302.5 24.885,57.22 25.225,56.88 R307.2 R305.1
VBAT_POS_MR_n: SW301.2 U302.3 | length 3.6
  Top Layer w0.4: SW301.2 20.586,59.4 20.64,59.454 U302.3
VBAT_POS_PB_RST: R306.1 SW301.1 | length 3.1
  Top Layer w0.4: R306.1 8.07,59.32 SW301.1
VBAT_POS_PG_R: LED301.1 R311.2 | length 2.7
  Top Layer w0.4: R311.2 27.47,62.005 27.72,61.755 LED301.1
VBAT_POS_PWR_GOOD: LED301.2 U302.1 | length 3.1
  Top Layer w0.4: U302.1 LED301.2
VBAT_POS_WDI: R309.2 U302.4 | length 2.5
  Top Layer w0.4: R309.2 U302.4
pads on no net: J200. J200.3 J200.6 J201. J202. J202.1 J202.5 J202.7 J203. J204. MH1.1 MH2.1 MH3.1 MH4.1 SW300.1 SW300.3 SW300.4 U300.2 U300.3

## Polygon pours and split planes (outlines as drawn)
3.3V on Top Layer "T_3.3V" (solid, remove dead copper, pour order 14): 0,100 0,0 100,0 100,100
VBAT_POS on Top Layer "T_VBAT_POS" (solid, remove dead copper, pour order 6): 22.86,55.88 22.86,52.07 10.16,52.07 10.16,42.075 10.123,42.039 10.123,27.94 10.123,2.032 62.23,2.032 62.23,8.382 57.782,8.382 57.821,8.343 57.821,7.112 39.343,7.112 39.343,8.382 34.29,8.382 34.29,7.005 19.028,7.005 19.028,8.382 13.213,8.382 13.213,32.136 29.21,32.136 29.21,34.93 16.51,34.93 16.51,49.53 29.21,49.53 29.21,55.88
V_EN on Top Layer "T_V_EN" (solid, remove dead copper, pour order 12): 20.32,42.3 20.32,36.83 35.575,36.83 35.575,42.3
V_SENSE on Top Layer "T_V_SENSE" (solid, remove dead copper, pour order 11): 46.99,31.2 46.99,39.8 40.977,39.8 39.701,39.8 39.701,31.2
V_PH/BOOT on Top Layer "T_V_PH/BOOT" (solid, remove dead copper, pour order 10): 32.725,30.48 32.725,21.59 38.875,21.59 38.704,21.761 38.704,30.48
VBAT_A on Top Layer "T_VBAT_A" (solid, remove dead copper, pour order 9): 35.715,30.35 33.552,30.35 33.552,27.94 25.293,27.94 25.293,31.38 35.715,31.38
5.0V on Top Layer "T_5.0V" (solid, remove dead copper, pour order 7): 75.97,10.668 75.97,7.112 80.264,7.112 80.264,12.7 72.06,12.7 72.06,35.979 45.523,35.979 45.523,30.535 37.977,30.535 37.977,12.7 12.593,12.7 12.593,10.668
GND on Bottom Layer "B_GND" (solid, remove dead copper, pour order 15): 100.33,100.33 100.33,0 0,0 0,100.08 0,100.33

## Keep-outs
Keep-Out Layer:
  the board outline again, w0.254

## Silkscreen, mask and mechanical layers (free items; w line width, h text height)
Top Overlay:
  text "Team04-aleXES-Power_Prox" at 60.198,79.756 h1.52
Mechanical 2:
  lines w0.254: 5,0 cw(c5,5) 0,5 0,95 cw(c5,95) 5,100 95,100 cw(c95,95) 100,95 100,5 cw(c95,5) 95,0 5,0 ; 5,0 5,0

## Text inside footprints (layer, text, board x,y; h text height)
U1: Top Overlay "ECE 453" at 72.898,82.296 h1.02